# Altium PCB wristband4.PcbDoc
Units mm, origin at the board's own origin, x right, y up, seen from the top; angles counter-clockwise.
Board outline 152.4 x 101.6 mm, 2 copper layers (Top Layer, Bottom Layer); 21 components, 27 nets, 105 pads, 0 vias.
Unrouted connection lines stored in the file: 60.
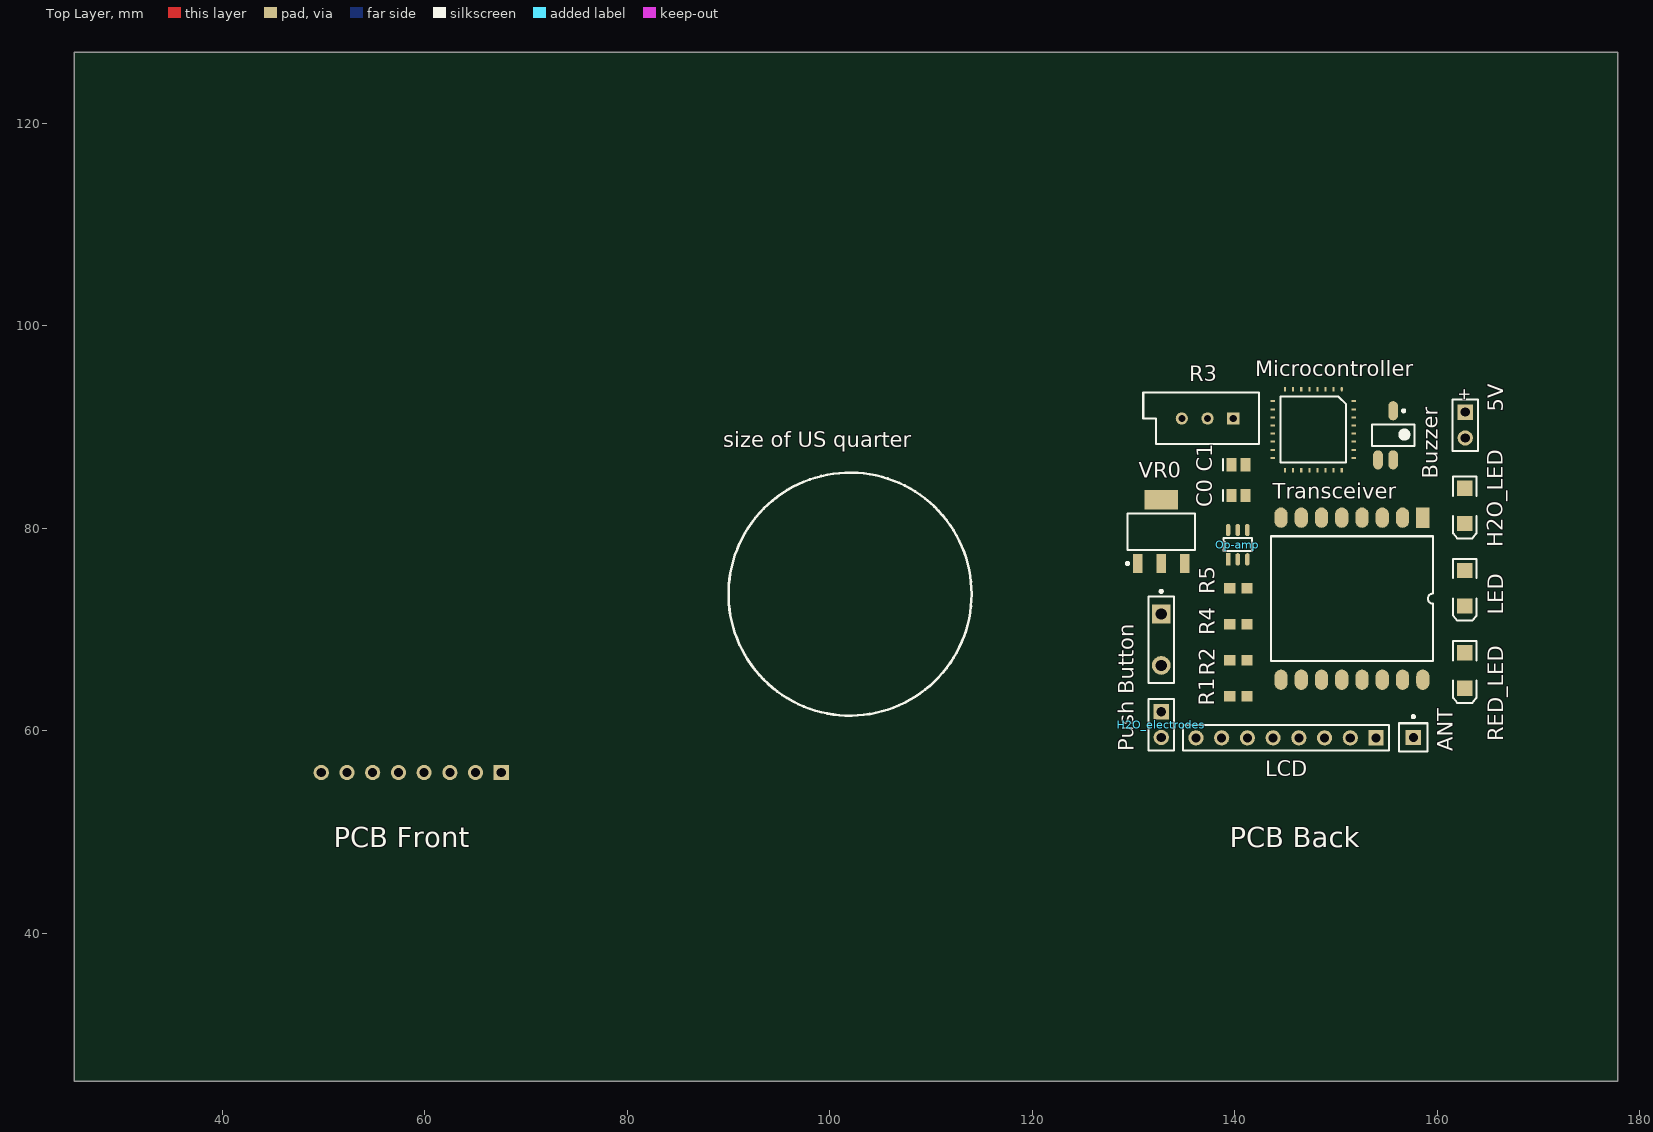
[diagram p0: Top Layer view]
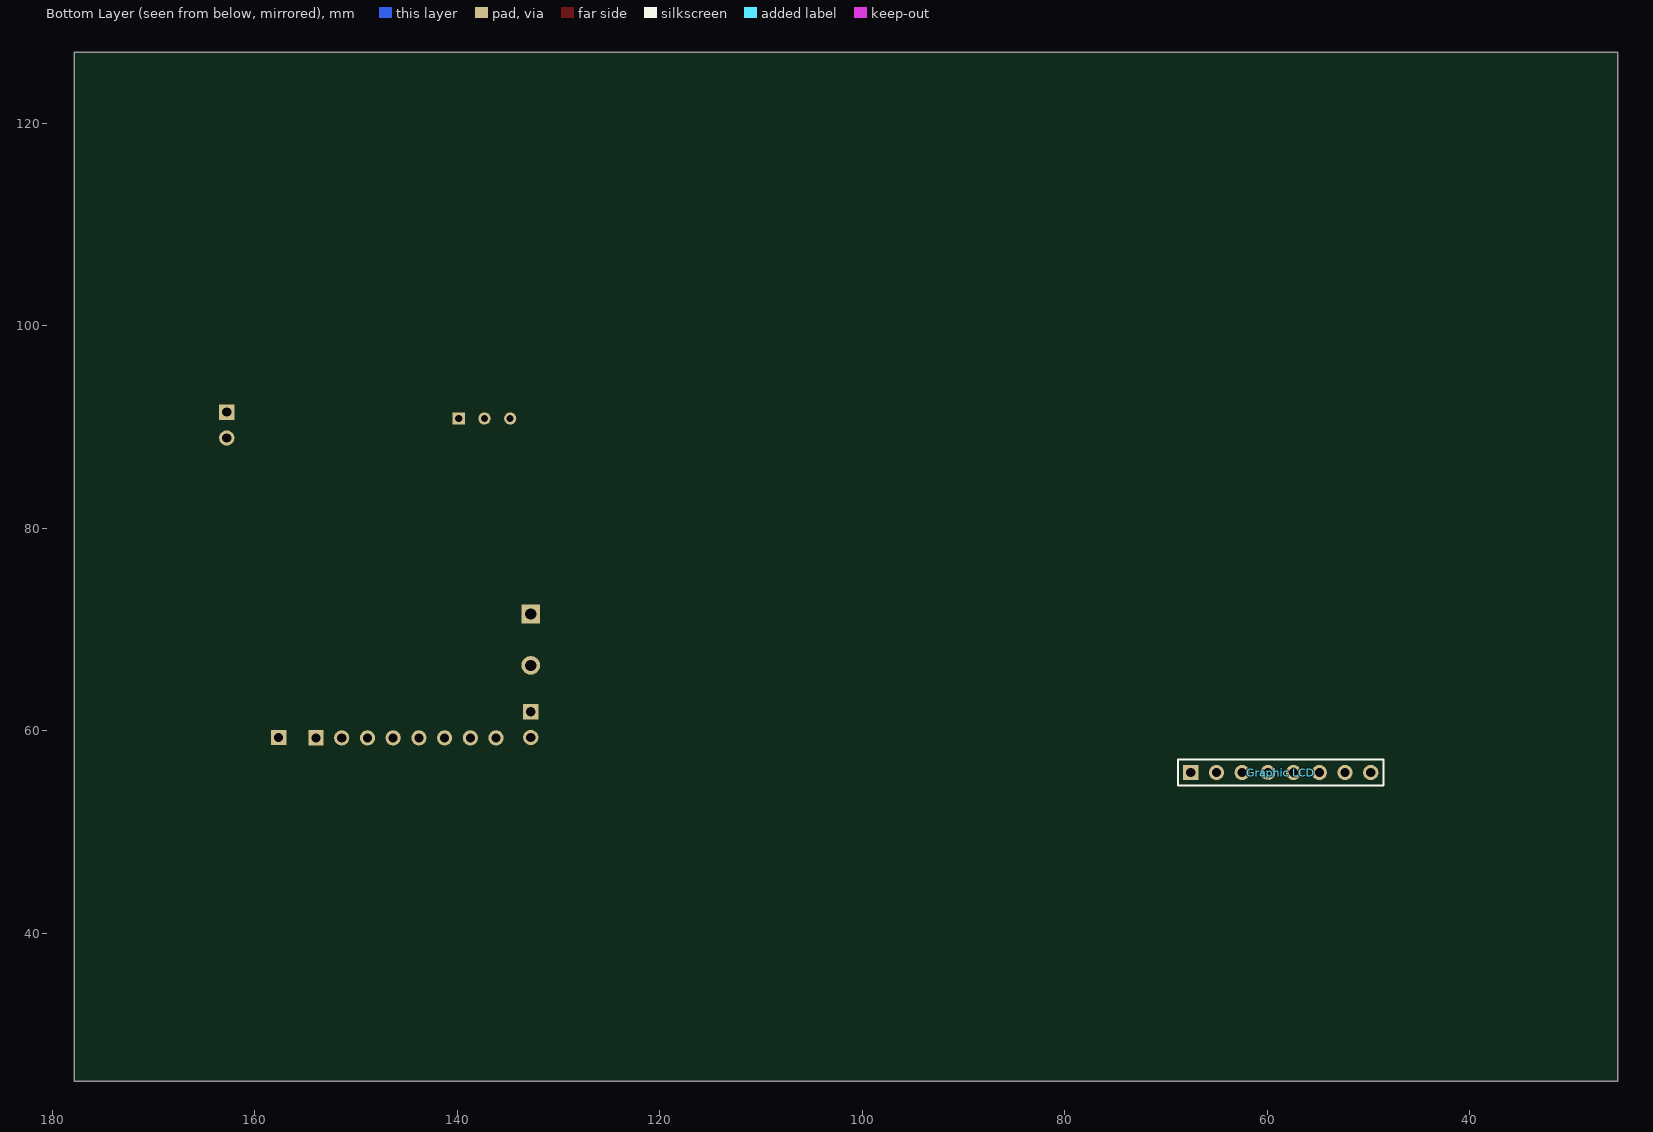
[diagram p1: Bottom Layer view, seen from below]

## Layer stack, top to bottom
Top Layer: signal copper 0.0356
Dielectric: dielectric 0.32, FR-4, Dk 4.8
Bottom Layer: signal copper 0.0356

## Board outline
25.4,25.4 177.8,25.4 177.8,127 25.4,127

## Design rules (kind name [scope] priority, off if disabled: settings)
Clearance [All] p1: gap=0.254
PolygonConnect [All] p1: connectstyle=Relief reliefconductorwidth=0.254 reliefentries=4 polygonreliefangle="90 Angle"
RoomDefinition wristband4 [InComponentClass('wristband4')] p1: confinementstyle=ConfineIn formatcopy=TRUE lockcomponents=FALSE outline 21,37 186,37 186,109.5 21,109.5
RoutingVias [All] p1: holewidth=0.711 width=1.27 viastyle="Through Hole" minholewidth=0.711 minwidth=1.27 maxholewidth=0.711 maxwidth=1.27
SilkscreenOverComponentPads [All] p1: minsilkscreentomaskgap=0.254
SolderMaskExpansion [All] p1: expansion=0.102
TestPointUsage [All] p1: valid=0 allowmultiple=FALSE
Testpoint [All] p1: side=15 testpointundercomponent=TRUE minsize=1.016 maxsize=2.54 preferedsize=1.524 minholesize=0 maxholesize=1.016 preferedholesize=0.813 testpointgrid=0.025 style=1023 order=0-112345678
Width [All] p1: maxlimit=0.254 minlimit=0.254 preferedwidth=0.254
23 further rules are at their usual default settings.

## Components (designator, comment, footprint, x,y, rotation, side; value= is the part's Value field where it differs from the comment)
5V "Battery" BAT-2 162.744,90.193 r270 top
ANT "Antenna" PIN1 157.62,59.348 r0 top
Buzzer "BUZZER" BUZZER_SOJ 155.632,89.177 r270 top
C0 "Cap Semi" 1310[0504] 140.348,83.224 r0 top
C1 "Cap Semi" 1310[0504] 140.348,86.272 r0 top
"Graphic LCD" "LCD_3D" LCD 67.564,55.88 r180 bottom
H2O_electrodes "Header 2" HDR1X2 132.728,61.888 r270 top
H2O_LED "LED2" 3.2X1.6X1.1 162.7,82.208 r270 top
LCD "LCD" HEADER1X8 387.348,12.192 r180 top
LED "LED2" 3.2X1.6X1.1 162.7,74.08 r270 top
Microcontroller "JL16" JL16_QUAD32 150.552,93.749 r270 top
Op-amp "OPAMP" OPAMP_SOP6 139.332,77.128 r90 top
"Push Button" "SW-PB" SPST-2 132.728,69 r270 top
R1 "Res3" J1-0603 140.348,63.412 r0 top
R2 "Res3" J1-0603 140.348,66.968 r180 top
R3 "RPot" VR5 137.3,90.844 r180 top
R4 "Res3" J1-0603 140.348,70.524 r0 top
R5 "Res3" J1-0603 140.348,74.08 r0 top
RED_LED "LED2" 3.2X1.6X1.1 162.7,65.952 r270 top
Transceiver "XCVR" XCVR_SOP16 158.553,81.049 r270 top
VR0 "Volt Reg" VREG_SOT 132.728,79.668 r90 top

## Footprints (in the part's own frame and the unit in brackets; to place one, negate y for a bottom-side part, rotate by r counter-clockwise, add the part's x,y. Pads: shape width x height; smd on the part's side, far side on the other; paste and mask are expansions set on the pad)
3.2X1.6X1.1 [mm] "SMT LED; 2 Flat Leads"
  rect 1.5x1.5 smd: 1(-1.75,0) 2(1.75,0)
  silkscreen extent -2.9,-1.15 3.2,1.15
1310[0504] [mm] "Chip Capacitor; Body 1.2 x 1.0 mm (LxW typ)"
  rect 1x1.3 smd: 1(-0.7,0) 2(0.7,0)
  silkscreen extent -1.5,-0.55 -1.5,0.55
BAT-2 [mm] "Multicell Battery; 2 Leads"
  rect 1.5x1.5 hole 0.9: 1(-1.27,0)
  round 1.5 hole 0.9: 2(1.27,0)
  silkscreen extent -2.54,-1.27 2.54,1.27
BUZZER_SOJ [mm] "SOJ, 3-Leads, Body 4.2x5.5mm (max), Pitch 1.50mm, IPC Low Density"
  oval 1.9x0.95 smd: 1(-2.425,0) 2(2.425,-1.5) 3(2.425,0)
  silkscreen extent -2.55,-2.1 1.08,2.1, body extent -2.75,-2.1 2.75,2.1, height 2.12
HDR1X2 [mm] "Connector; Header; 2 Position"
  rect 1.5x1.5 hole 0.9: 1(0,0)
  round 1.5 hole 0.9: 2(2.54,0)
  silkscreen extent -1.27,-1.27 3.81,1.27
HEADER1X8 [mm]
  rect 1.5x1.5 hole 0.9: 1(233.413,-47.116)
  round 1.5 hole 0.9: 2(235.953,-47.116) 3(238.493,-47.116) 4(241.033,-47.116) 5(243.573,-47.116) 6(246.113,-47.116) 7(248.653,-47.116) 8(251.193,-47.116)
  silkscreen extent 232.14,-48.39 252.46,-45.85
J1-0603 [mm] "Chip Resistor; Body 1.6 x 0.8 mm (LxW typ)"
  rect 1.1x1 smd: 1(-0.85,0) 2(0.85,0)
JL16_QUAD32 [mm]
  oval 0.45x0.2 smd: 1(0,0)
  rect 0.45x0.2 smd: 2(0,-0.8) 3(0,-1.6) 4(0,-2.4) 5(0,-3.2) 6(0,-4) 7(0,-4.8) 8(0,-5.6) 17(8,-5.6) 18(8,-4.8) 19(8,-4) 20(8,-3.2) 21(8,-2.4) 22(8,-1.6) 23(8,-0.8) 24(8,0)
  rect 0.2x0.45 smd: 9(1.2,-6.8) 10(2,-6.8) 11(2.8,-6.8) 12(3.6,-6.8) 13(4.4,-6.8) 14(5.2,-6.8) 15(6,-6.8) 16(6.8,-6.8) 25(6.8,1.2) 26(6,1.2) 27(5.2,1.2) 28(4.4,1.2) 29(3.6,1.2) 30(2.8,1.2) 31(2,1.2) 32(1.2,1.2)
  silkscreen extent 0.76,-6.04 7.24,0.44, body extent 0.3,-6.5 7.7,0.9, height 1.6
LCD [mm] "Connector; Header; 8 Position"
  rect 1.5x1.5 hole 0.9: 1(0,0)
  round 1.5 hole 0.9: 2(2.54,0) 3(5.08,0) 4(7.62,0) 5(10.16,0) 6(12.7,0) 7(15.24,0) 8(17.78,0)
  silkscreen extent -1.27,-1.27 19.05,1.27, body extent -13,-3 31,42, height 3.01
OPAMP_SOP6 [mm]
  rect 1.22x0.45 smd: 1(-0.2,0)
  oval 1.22x0.45 smd: 2(-0.2,-0.95) 3(-0.2,-1.9) 4(2.7,-1.9) 5(2.7,-0.95) 6(2.7,0)
  silkscreen extent 0.63,-2.38 1.9,0.48, body extent 0.5,-2.5 2,0.6, height 1
PIN1 [mm] "Generic Antenna; 1 Lead"
  rect 1.5x1.5 hole 0.9: 1(0,0)
  silkscreen extent -1.4,-1.4 1.4,2.17
SPST-2 [mm] "Circuit Breaker; 2 Leads"
  rect 1.85x1.85 hole 1.1: 1(-2.54,0)
  round 1.85 hole 1.1: 2(2.54,0)
  silkscreen extent -4.89,-1.27 4.28,1.27
VR5 [mm] "Potentiometer; 3 Leads"
  rect 1.2x1.2 hole 0.7: 1(-2.54,0)
  round 1.2 hole 0.7: 2(0,0) 3(2.54,0)
  silkscreen extent -5.08,-2.54 6.35,2.54
VREG_SOT [mm] "SOT223, 4-Leads, Body 6.7x7.3mm (max), Pitch 2.31mm, IPC Medium Density"
  rect 1.9x0.95 smd: 1(-3.15,2.311) 2(-3.15,0) 3(-3.15,-2.311)
  rect 1.9x3.3 smd: 4(3.15,0)
  silkscreen extent -3.27,-3.35 1.8,3.46, body extent -1.85,-3.35 1.85,3.35, height 1.8
XCVR_SOP16 [mm]
  rect 2x1.3 smd: 1(0,0)
  oval 2x1.3 smd: 2(0,-2) 3(0,-4) 4(0,-6) 5(0,-8) 6(0,-10) 7(0,-12) 8(0,-14) 9(16,-14) 10(16,-12) 11(16,-10) 12(16,-8) 13(16,-6) 14(16,-4) 15(16,-2) 16(16,0)
  silkscreen extent 1.84,-15 14.17,1, body extent 1,-15 15,1, height 1.8

## Part data
5V: "Multicell Battery"
ANT: "Generic Antenna"
C0 C1: "Capacitor (Semiconductor SIM Model)"
H2O_electrodes: "Header, 2-Pin"
H2O_LED LED RED_LED: "Typical RED, GREEN, YELLOW, AMBER GaAs LED"
Microcontroller: "Freescale MC908JL16"
Op-amp: "LT6230CS6"
"Push Button": "Switch"
R1 R2 R4 R5: "Resistor"
R3: "Potentiometer"
Transceiver: "RFM22B"
VR0: "Voltage Regulator"

## Nets (pads, with @x,y where several pads share a name; then routed paths per layer and width w, separated by ;. In a path a pad name is that pad's centre, name@x,y a point inside that pad or via, vN(x,y) a via of type N, cw(c..) or ccw(c..) an arc to the next point about the centre after c; other vN are vias at no path point)
3.3V: Buzzer.1 C1.2 LCD.1 Microcontroller.7 Transceiver.11 VR0.3
5V: 5V.1 C0.2 H2O_electrodes.1 Op-amp.6 R3.2 R4.2 VR0.1
DC: LCD.5 Microcontroller.18
DN: LCD.6 Microcontroller.17
GND: 5V.2 "Graphic LCD.1" "Graphic LCD.2" "Graphic LCD.3" "Graphic LCD.4" "Graphic LCD.5" "Graphic LCD.6" "Graphic LCD.7" "Graphic LCD.8" "Push Button.1" C0.1 C1.1 LCD.2 LED.2 Microcontroller.3 Op-amp.2 Op-amp.4 Op-amp.5 R1.1 R2.1 R2.2 R3.1 RED_LED.2 Transceiver.12 VR0.2
LED: LCD.8 R5.1
NetANT_1: ANT.1 Transceiver.14
NetBuzzer_3: Buzzer.3 Microcontroller.8
NetH2O_electrodes_2: H2O_electrodes.2 R1.2
NetH2O_LED_1: H2O_LED.1 R4.1
NetH2O_LED_2: H2O_LED.2 Microcontroller.6 Op-amp.1
NetLED_1: LED.1 Microcontroller.2
NetMicrocontroller_4: Microcontroller.4 Transceiver.8
NetMicrocontroller_9: "Push Button.2" Microcontroller.9
NetMicrocontroller_12: Microcontroller.12 R5.2
NetMicrocontroller_13: Microcontroller.13 Transceiver.7
NetMicrocontroller_14: Microcontroller.14 Transceiver.6
NetMicrocontroller_16: Microcontroller.16 Transceiver.1
NetMicrocontroller_19: Microcontroller.19 Transceiver.2
NetMicrocontroller_22: Microcontroller.22 Transceiver.4
NetMicrocontroller_23: Microcontroller.23 RED_LED.1
NetMicrocontroller_24: Microcontroller.24 Transceiver.3
NetMicrocontroller_26: Microcontroller.26 Transceiver.5
NetOp-amp_3: Op-amp.3 R3.3
RST: LCD.4 Microcontroller.20
SCE: LCD.3 Microcontroller.21
SCLK: LCD.7 Microcontroller.15
pads on no net: Buzzer.2 Microcontroller.1 Microcontroller.5 Microcontroller.10 Microcontroller.11 Microcontroller.25 Microcontroller.27 Microcontroller.28 Microcontroller.29 Microcontroller.30 Microcontroller.31 Microcontroller.32 Transceiver.9 Transceiver.10 Transceiver.13 Transceiver.15 Transceiver.16 VR0.4

## Silkscreen, mask and mechanical layers (free items; w line width, h text height)
Top Overlay:
  circle w0.254: c102,73.5 r12
  text "size of US quarter" at 89.5,88 h1.52
  text "PCB Front" at 51,48.5 h2
  text "PCB Back" at 139.5,48.5 h2
Top Solder:
  lines w0.254: 123,53 123,98 168,98 168,53 123,53

## Text inside footprints (layer, text, board x,y; h text height)
5V: Top Overlay "+" at 162.167,93.863 h1.15 r270